# EAGLE board Trabajo Practico Nº 16 Autito a control Remoto (EAGLE 7.6.0)

Size 73.58 x 63.39 mm. Coordinates in mm from the lower left corner, seen from the top.
Outline: 0,0 56.82,0 56.82,53.33 0,53.33 0,0
Copper layers (1*16): Top 0.035mm / dielectric 1.5mm / Bottom 0.035mm
Design rules "default": minimum track width 10mil, minimum drill 24mil, track to track 8mil, track to pad 8mil, pad to pad 8mil, via to via 8mil, smd to smd 8mil, copper to edge 40mil, drill to drill 8mil, minimum pad ring 10mil, minimum via ring 8mil, stop-mask expansion 4mil, vias tented up to drill 0mil, thermal gap 10mil

## Footprints (pad centres in the part's own frame; a part is rotated, then mirrored left to right if it is on the bottom)
DC-POWER = drill 0.889 pad 2.54 octagon: + 0,2.54; - 0,-2.54
LED5MM = drill 0.813 octagon: A -1.27,0; K 1.27,0
1X3P-2.54-2.54-11.6-3.0-BLACK-MALE = drill 0.889 pad 1.651 square: 1 0,2.54 | drill 0.889 pad 1.651: 2 0,0; 3 0,-2.54
0207/10 = drill 0.813 octagon: 1 -5.08,0; 2 5.08,0
M251 = drill 0.813 long: 1 -2.54,0; 2 0,0; 3 2.54,0
ARDUINO_UNO = drill 1.016 pad 1.88: 0 63.5,50.8; 1 60.96,50.8; 2 58.42,50.8; 3 55.88,50.8; 3.3V 35.56,2.54; 4 53.34,50.8; 5 50.8,50.8; 5V 38.1,2.54; 6 48.26,50.8; 7 45.72,50.8; 8 41.656,50.8; 9 39.116,50.8; 10 36.576,50.8; 11 34.036,50.8; 12 31.496,50.8; 13 28.956,50.8; A0 50.8,2.54; A1 53.34,2.54; A2 55.88,2.54; A3 58.42,2.54; A4 60.96,2.54; A5 63.5,2.54; AREF 23.876,50.8; GND 26.416,50.8; GND. 43.18,2.54; GND.. 40.64,2.54; I/OREF 30.48,2.54; N/C 27.94,2.54; RESET 33.02,2.54; SCL 18.796,50.8; SDA 21.336,50.8; VIN 45.72,2.54 | hole 3.2: 66.04,7.62; 66.04,35.56; 15.24,50.8; 13.97,2.54
2X4P-2.54-65/35MIL = drill 0.889 pad 1.651 square: 1 -1.27,3.81 | drill 0.889 pad 1.651: 2 -1.27,1.27; 3 -1.27,-1.27; 4 -1.27,-3.81; 5 1.27,-3.81; 6 1.27,-1.27; 7 1.27,1.27; 8 1.27,3.81
DIL16 = drill 0.813 long: 1 -8.89,-3.81; 2 -6.35,-3.81; 3 -3.81,-3.81; 4 -1.27,-3.81; 5 1.27,-3.81; 6 3.81,-3.81; 7 6.35,-3.81; 8 8.89,-3.81; 9 8.89,3.81; 10 6.35,3.81; 11 3.81,3.81; 12 1.27,3.81; 13 -1.27,3.81; 14 -3.81,3.81; 15 -6.35,3.81; 16 -8.89,3.81

## Placement (x,y rotation side)
BAT1  [DC-POWER]  5,60.88 0 top
D1  [LED5MM]  5,48.18 0 top
PIR1  [1X3P-2.54-2.54-11.6-3.0-BLACK-MALE]  5,137.08 0 top  (outside the outline)
R1  10k‎Ω  [0207/10]  5,111.68 0 top  (outside the outline)
R2  220‎Ω  [0207/10]  5,124.38 0 top  (outside the outline)
R3  5.8k‎Ω  [0207/10]  5,35.48 0 top
S1  [M251]  5,73.58 0 top  (outside the outline)
U1  [ARDUINO_UNO]  5,10.08 0 top
U2  [2X4P-2.54-65/35MIL]  5,22.78 0 top
U3  [DIL16]  5,86.28 0 top  (outside the outline)
U4  [DIL16]  5,98.98 0 top  (outside the outline)

## Library data of the parts
BAT1 D1 PIR1 R1-R3 S1 U1-U4 = AUTODESK_CIRCUITS_BREADBOARD

## Nets
N$1: BAT1.+ U3.8 U3.16 U4.8 U4.16
N$2: U3.6
N$3: U3.3
N$4: U1.3 U3.1
N$5: U1.5 U3.9
N$6: U1.2 U3.2
N$7: U1.4 U3.7
N$8: U3.14
N$9: U3.11
N$10: U1.7 U3.10
N$11: U1.8 U3.15
N$12: BAT1.- U1.GND. U3.4 U3.5 U3.12 U3.13 U4.4 U4.5 U4.12 U4.13
N$13: U1.9 U4.1
N$14: U1.6 U4.9
N$15: U4.14
N$16: U4.11
N$17: U1.10 U4.10
N$18: U1.11 U4.15
N$19: U4.3
N$20: U4.6
N$21: U1.12 U4.2
N$22: U1.13 U4.7
N$23: D1.K R1.1 S1.3 U1.GND U2.4
N$24: U1.3.3V U2.8
N$25: R3.1 U1.1
N$26: R1.2 R3.2 U2.1
N$27: U1.0 U2.5
N$28: D1.A U2.6
N$29: S1.2 U2.7
N$30: R2.2 U1.A0
N$31: R2.1 S1.1
N$32: PIR1.2 U1.5V
N$33: PIR1.1 U1.GND..
N$34: PIR1.3 U1.A1

## Tracks (layer width: path | path; a pad name or v marks a point on that pad's centre or on a via)
N$1  (4 unrouted)
N$4  (1 unrouted)
N$5  (1 unrouted)
N$6  (1 unrouted)
N$7  (1 unrouted)
N$10  (1 unrouted)
N$11  (1 unrouted)
N$12  (9 unrouted)
N$13  (1 unrouted)
N$14  (1 unrouted)
N$17  (1 unrouted)
N$18  (1 unrouted)
N$21  (1 unrouted)
N$22  (1 unrouted)
N$23  (4 unrouted)
N$24  (1 unrouted)
N$25  (1 unrouted)
N$26  (2 unrouted)
N$27  (1 unrouted)
N$28  (1 unrouted)
N$29  (1 unrouted)
N$30  (1 unrouted)
N$31  (1 unrouted)
N$32  (1 unrouted)
N$33  (1 unrouted)
N$34  (1 unrouted)